# EAGLE board Rover BeagleBone Cape (EAGLE 7.1.0)
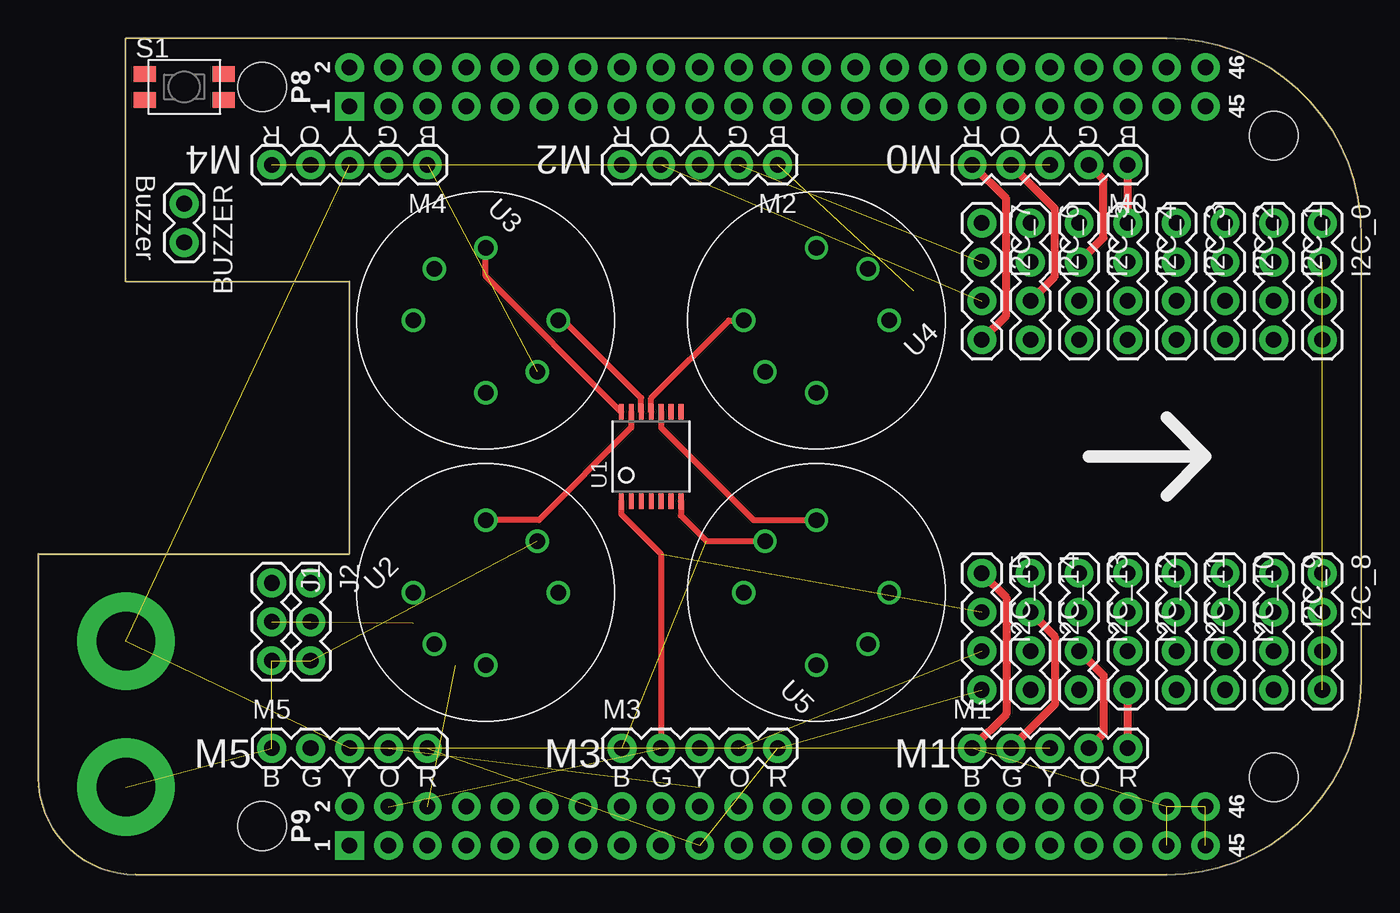
[diagram p0: board, top side]
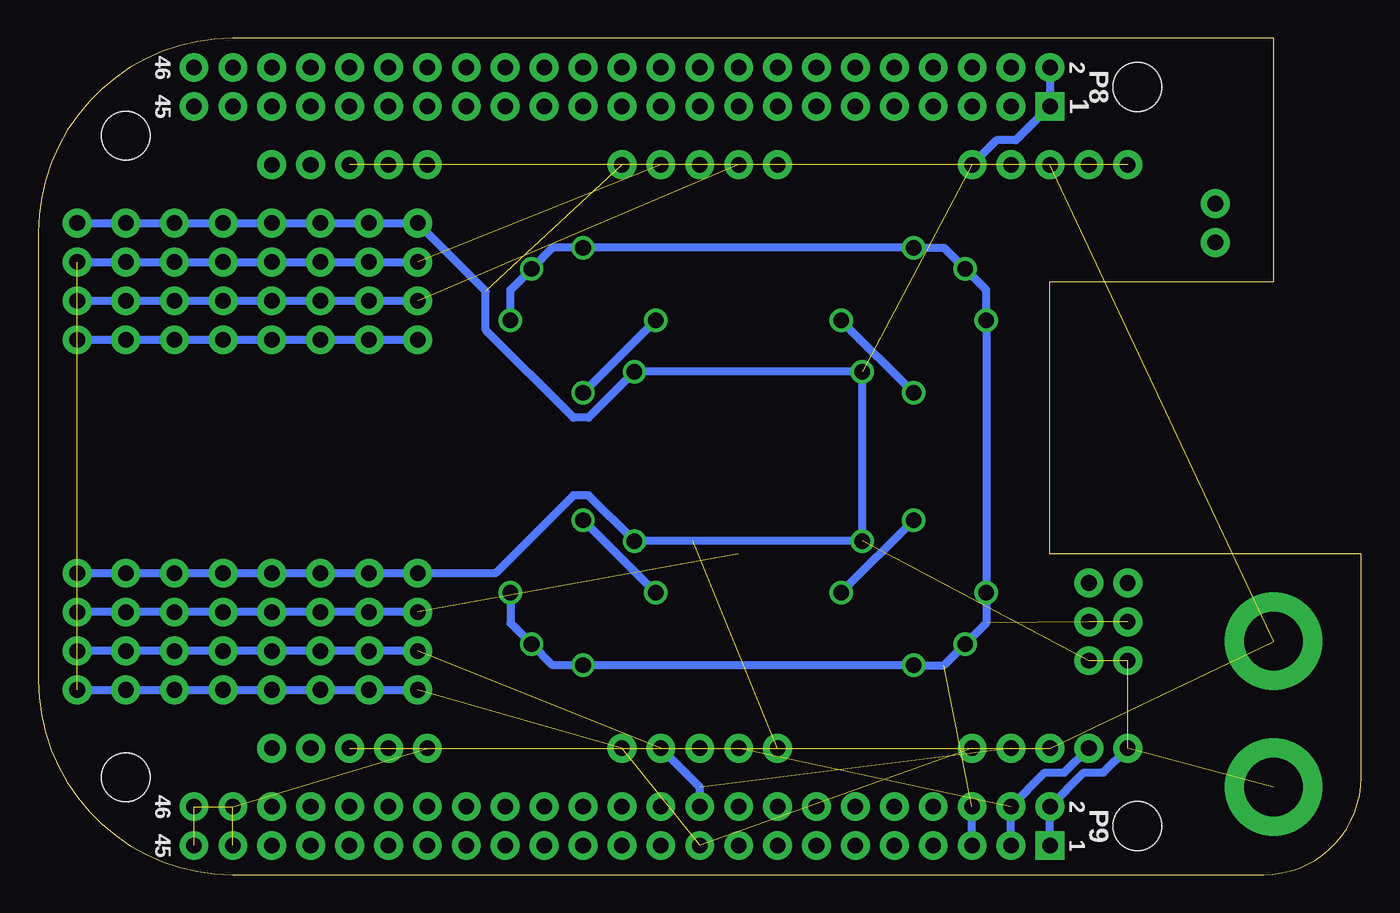
[diagram p1: board, bottom side, seen from below]

Size 86.36 x 54.61 mm. Coordinates in mm from the lower left corner, seen from the top.
Outline: 73.66,54.61 arc-90 86.36,41.91 86.36,12.7 arc-90 73.66,0 6.35,0 arc-90 0,6.35 0,20.95 20.32,20.95 20.32,38.73 5.71,38.73 5.71,54.61 73.66,54.61
Copper layers (1*16): Top 0.035mm / dielectric 1.5mm / Bottom 0.035mm
Design rules "2-Layer DRC": minimum track width 8mil, minimum drill 13mil, track to track 6mil, track to pad 6mil, pad to pad 6mil, via to via 6mil, smd to smd 6mil, copper to edge 15mil, drill to drill 6mil, minimum pad ring 10mil, minimum via ring 7mil, stop-mask expansion 0mil, vias tented up to drill 16mil, thermal gap 10mil

## Footprints (pad centres in the part's own frame; a part is rotated, then mirrored left to right if it is on the bottom)
M-1X02-0.1-PTH = drill 1.016 pad 1.88: 1 -1.27,0; 2 1.27,0
M-1X04-0.1-PTH = drill 1.016 pad 1.88: 1 -3.81,0; 2 -1.27,0; 3 1.27,0; 4 3.81,0
M-1X03-0.1-PTH = drill 1.016 pad 1.88: 1 -2.54,0; 2 0,0; 3 2.54,0
M-1X05-0.1-PTH = drill 1.016 pad 1.88: 1 -5.08,0; 2 -2.54,0; 3 0,0; 4 2.54,0; 5 5.08,0
SWITCH-TACTILE-SMD = smd 1.45 x 1: 1 2.575,0.85; 2 2.575,-0.85; 3 -2.575,0.85; 4 -2.575,-0.85
TSSOP14 = smd 0.305 x 0.991: 1 -1.95,-2.918; 2 -1.3,-2.918; 3 -0.65,-2.918; 4 0,-2.918; 5 0.65,-2.918; 6 1.3,-2.918; 7 1.95,-2.918; 8 1.95,2.918; 9 1.3,2.918; 10 0.65,2.918; 11 0,2.918; 12 -0.65,2.918; 13 -1.3,2.918; 14 -1.95,2.918
MQ-X = drill 1.016: A1 -3.35,3.35; A2 -3.35,-3.35; B1 3.35,3.35; B2 3.35,-3.35; HA -4.75,0; HB 4.75,0
BEAGLE_BONE_BLACK_CAPE = drill 1.016 pad 1.88 square: P8.1 20.32,50.165; P9.1 20.32,1.905 | drill 1.016 pad 1.88: P8.2 20.32,52.705; P8.3 22.86,50.165; P8.4 22.86,52.705; P8.5 25.4,50.165; P8.6 25.4,52.705; P8.7 27.94,50.165; P8.8 27.94,52.705; P8.9 30.48,50.165; P8.10 30.48,52.705; P8.11 33.02,50.165; P8.12 33.02,52.705; P8.13 35.56,50.165; P8.14 35.56,52.705; P8.15 38.1,50.165; P8.16 38.1,52.705; P8.17 40.64,50.165; P8.18 40.64,52.705; P8.19 43.18,50.165; P8.20 43.18,52.705; P8.21 45.72,50.165; P8.22 45.72,52.705; P8.23 48.26,50.165; P8.24 48.26,52.705; P8.25 50.8,50.165; P8.26 50.8,52.705; P8.27 53.34,50.165; P8.28 53.34,52.705; P8.29 55.88,50.165; P8.30 55.88,52.705; P8.31 58.42,50.165; P8.32 58.42,52.705; P8.33 60.96,50.165; P8.34 60.96,52.705; P8.35 63.5,50.165; P8.36 63.5,52.705; P8.37 66.04,50.165; P8.38 66.04,52.705; P8.39 68.58,50.165; P8.40 68.58,52.705; P8.41 71.12,50.165; P8.42 71.12,52.705; P8.43 73.66,50.165; P8.44 73.66,52.705; P8.45 76.2,50.165; P8.46 76.2,52.705; P9.2 20.32,4.445; P9.3 22.86,1.905; P9.4 22.86,4.445; P9.5 25.4,1.905; P9.6 25.4,4.445; P9.7 27.94,1.905; P9.8 27.94,4.445; P9.9 30.48,1.905; P9.10 30.48,4.445; P9.11 33.02,1.905; P9.12 33.02,4.445; P9.13 35.56,1.905; P9.14 35.56,4.445; P9.15 38.1,1.905; P9.16 38.1,4.445; P9.17 40.64,1.905; P9.18 40.64,4.445; P9.19 43.18,1.905; P9.20 43.18,4.445; P9.21 45.72,1.905; P9.22 45.72,4.445; P9.23 48.26,1.905; P9.24 48.26,4.445; P9.25 50.8,1.905; P9.26 50.8,4.445; P9.27 53.34,1.905; P9.28 53.34,4.445; P9.29 55.88,1.905; P9.30 55.88,4.445; P9.31 58.42,1.905; P9.32 58.42,4.445; P9.33 60.96,1.905; P9.34 60.96,4.445; P9.35 63.5,1.905; P9.36 63.5,4.445; P9.37 66.04,1.905; P9.38 66.04,4.445; P9.39 68.58,1.905; P9.40 68.58,4.445; P9.41 71.12,1.905; P9.42 71.12,4.445; P9.43 73.66,1.905; P9.44 73.66,4.445; P9.45 76.2,1.905; P9.46 76.2,4.445 | hole 3.175: 14.605,3.175; 80.645,6.35; 80.645,48.26; 14.605,51.435

## Placement (x,y rotation side)
BUZZER  [M-1X02-0.1-PTH]  9.53,42.55 270 top
I2C_0  IMU  [M-1X04-0.1-PTH]  83.82,38.73 270 top
I2C_1  Gas  [M-1X04-0.1-PTH]  80.64,38.73 270 top
I2C_2  Optical Dust  [M-1X04-0.1-PTH]  77.47,38.73 270 top
I2C_3  Temperature  [M-1X04-0.1-PTH]  74.3,38.73 270 top
I2C_4  Humidity  [M-1X04-0.1-PTH]  71.12,38.73 270 top
I2C_5  Barometric  [M-1X04-0.1-PTH]  67.94,38.73 270 top
I2C_6  Light  [M-1X04-0.1-PTH]  64.77,38.73 270 top
I2C_7  1X04M-0.1-PTH  [M-1X04-0.1-PTH]  61.59,38.73 270 top
I2C_8  IR Temp  [M-1X04-0.1-PTH]  83.82,15.88 270 top
I2C_9  Color  [M-1X04-0.1-PTH]  80.64,15.88 270 top
I2C_10  1X04M-0.1-PTH  [M-1X04-0.1-PTH]  77.47,15.88 270 top
I2C_11  1X04M-0.1-PTH  [M-1X04-0.1-PTH]  74.3,15.88 270 top
I2C_12  1X04M-0.1-PTH  [M-1X04-0.1-PTH]  71.12,15.88 270 top
I2C_13  1X04M-0.1-PTH  [M-1X04-0.1-PTH]  67.94,15.88 270 top
I2C_14  1X04M-0.1-PTH  [M-1X04-0.1-PTH]  64.77,15.88 270 top
I2C_15  1X04M-0.1-PTH  [M-1X04-0.1-PTH]  61.59,15.88 270 top
J1  [M-1X03-0.1-PTH]  15.24,16.51 270 top
J2  [M-1X03-0.1-PTH]  17.78,16.51 270 top
M0  [M-1X05-0.1-PTH]  66.04,46.35 180 top
M1  [M-1X05-0.1-PTH]  66.04,8.26 0 top
M2  [M-1X05-0.1-PTH]  43.18,46.35 180 top
M3  [M-1X05-0.1-PTH]  43.18,8.26 0 top
M4  [M-1X05-0.1-PTH]  20.32,46.35 180 top
M5  [M-1X05-0.1-PTH]  20.32,8.26 0 top
S1  [SWITCH-TACTILE-SMD]  9.53,51.44 0 top
U1  [TSSOP14]  40.01,27.3 0 top
U2  Hydrogen  [MQ-X]  29.21,18.41 45 top
U3  Carbon Monoxide  [MQ-X]  29.21,36.2 315 top
U4  LPG  [MQ-X]  50.8,36.2 225 top
U5  Methane  [MQ-X]  50.8,18.41 135 top
U$1  BEAGLE_BONE_BLACK_CAPE  [BEAGLE_BONE_BLACK_CAPE]  0,0 0 top

## Library data of the parts
BUZZER I2C_0 I2C_1-I2C_15 J1 J2 M0 M1-M5 S1 U2-U5 = Jordi
U1 = SparkFun-DigitalIC
U$1 = SparkFun-Boards

## Nets
+3V3: I2C_0.2 I2C_1.2 I2C_2.2 I2C_3.2 I2C_4.2 I2C_5.2 I2C_6.2 I2C_7.2 I2C_8.2 I2C_9.2 I2C_10.2 I2C_11.2 I2C_12.2 I2C_13.2 I2C_14.2 I2C_15.2 M0.2 M1.2 M2.2 M3.2 M4.2 M5.2 U1.1 U$1.P9.3 U$1.P9.4
+5V: J1.2 J2.2 U1.14 U2.A1 U2.A2 U2.HA U3.A1 U3.A2 U3.HA U4.A1 U4.A2 U4.HA U5.A1 U5.A2 U5.HA U$1.P9.5 U$1.P9.6
G1: U1.13 U2.B1 U2.B2
G2: U1.12 U3.B1 U3.B2
G3: U1.11 U4.B1 U4.B2
G4: U1.10 U5.B1 U5.B2
GND: I2C_0.1 I2C_1.1 I2C_2.1 I2C_3.1 I2C_4.1 I2C_5.1 I2C_6.1 I2C_7.1 I2C_8.1 I2C_9.1 I2C_10.1 I2C_11.1 I2C_12.1 I2C_13.1 I2C_14.1 I2C_15.1 J1.3 J2.3 M0.1 M1.1 M2.1 M3.1 M4.1 M5.1 U1.7 U2.HB U3.HB U4.HB U5.HB U$1.P8.1 U$1.P8.2 U$1.P9.1 U$1.P9.2 U$1.P9.43 U$1.P9.44 U$1.P9.45 U$1.P9.46
SCL: I2C_0.4 I2C_1.4 I2C_2.4 I2C_3.4 I2C_4.4 I2C_5.4 I2C_6.4 I2C_7.4 I2C_8.4 I2C_9.4 I2C_10.4 I2C_11.4 I2C_12.4 I2C_13.4 I2C_14.4 I2C_15.4 M0.5 M1.5 M2.5 M3.5 M4.5 M5.5 U$1.P9.19
SDA: I2C_0.3 I2C_1.3 I2C_2.3 I2C_3.3 I2C_4.3 I2C_5.3 I2C_6.3 I2C_7.3 I2C_8.3 I2C_9.3 I2C_10.3 I2C_11.3 I2C_12.3 I2C_13.3 I2C_14.3 I2C_15.3 M0.4 M1.4 M2.4 M3.4 M4.4 M5.4 U$1.P9.20
VCC: M0.3 M1.3 M2.3 M3.3 M4.3 M5.3

## Tracks (layer width: path | path; a pad name or v marks a point on that pad's centre or on a via)
+3V3  (5 unrouted)
  Top 0.381: U1.1 38.05,23.54 40.64,20.95 M3.2
  Top 0.508: I2C_14.2 66.36,15.56 66.36,11.11 M1.2 | I2C_5.2 69.53,41.59 69.53,45.4 M0.2
  Bottom 0.508: I2C_15.2 I2C_14.2 I2C_13.2 I2C_12.2 I2C_11.2 I2C_10.2 I2C_9.2 I2C_8.2 | I2C_0.2 I2C_1.2 I2C_2.2 I2C_3.2 I2C_4.2 I2C_5.2 I2C_6.2 I2C_7.2 | U$1.P9.3 U$1.P9.4 20.64,6.67 19.37,6.67 M5.2
+5V  (3 unrouted)
  Top 0.381: U1.14 29.21,39.07 U3.A1
  Bottom 0.508: U5.A2 55.54,16.43 U5.HA 52.78,13.68 U5.A1 U2.A2 27.23,13.68 U2.HA 24.47,16.43 U2.A1 U3.A2 24.47,38.17 U3.HA 27.23,40.93 U3.A1 U4.A2 52.78,40.93 U4.HA 55.54,38.17 U4.A1 | U$1.P9.5 U$1.P9.6
G1
  Top 0.381: U1.13 38.7,29.18 32.68,23.15 U2.B1
  Bottom 0.508: U2.B1 U2.B2
G2
  Top 0.381: U1.12 39.35,31.13 34.29,36.2 U3.B1
  Bottom 0.508: U3.B1 | U3.B1 U3.B2
G3
  Top 0.381: U1.11 40.01,31.11 45.09,36.2 U4.B2
  Bottom 0.508: U4.B1 U4.B2
G4
  Top 0.381: U1.10 40.66,29.2 46.7,23.15 U5.B2
  Bottom 0.508: U5.B1 | U5.B1 U5.B2
GND  (via drill 3.81 pad 6.35)  (11 unrouted)
  Top 0.381: U1.7 41.95,23.45 43.63,21.77 U5.HB
  Top 0.508: I2C_4.1 M0.1 | I2C_15.1 63.18,18.1 63.18,10.48 M1.1
  Bottom 0.508: I2C_8.1 I2C_9.1 I2C_10.1 I2C_11.1 I2C_12.1 I2C_13.1 I2C_14.1 I2C_15.1 56.52,19.68 51.44,24.77 50.43,24.77 U5.HB U2.HB U3.HB U4.HB 50.43,29.84 51.44,29.84 57.15,35.56 57.15,38.1 I2C_7.1 I2C_6.1 I2C_5.1 I2C_4.1 I2C_3.1 I2C_2.1 I2C_1.1 I2C_0.1 | U$1.P8.2 U$1.P8.1 22.54,47.94 23.81,47.94 M4.1 | U$1.P9.1 U$1.P9.2 18.1,6.67 16.83,6.67 M5.1
  other vias: 5.71,5.71
SCL  (6 unrouted)
  Top 0.508: M1.5 I2C_12.4 | I2C_7.4 63.18,36.51 63.18,44.13 M0.5
  Bottom 0.508: I2C_8.4 I2C_9.4 I2C_10.4 I2C_11.4 I2C_12.4 I2C_13.4 I2C_14.4 I2C_15.4 | I2C_0.4 I2C_1.4 I2C_2.4 I2C_3.4 I2C_4.4 I2C_5.4 I2C_6.4 I2C_7.4
SDA  (5 unrouted)
  Top 0.508: I2C_13.3 69.53,13.02 69.53,9.21 M1.4 | I2C_6.3 66.36,39.05 66.36,43.5 M0.4
  Bottom 0.508: I2C_15.3 I2C_14.3 I2C_13.3 I2C_12.3 I2C_11.3 I2C_10.3 I2C_9.3 I2C_8.3 | I2C_7.3 I2C_6.3 I2C_5.3 I2C_4.3 I2C_3.3 I2C_2.3 I2C_1.3 I2C_0.3 | U$1.P9.20 43.18,5.71 M3.4
VCC  (via drill 3.81 pad 6.35)  (6 unrouted)
  other vias: 5.71,15.24

## Text on the board
_tsilk: R | O | Y | G | B | R | O | Y | G | B | R | O | Y | G | B | M4 | M2 | M0 | Buzzer | M5 | M3 | M1 | B | G | Y | O | R | B | G | Y | O | R | B | G | Y | O | R